# Altium PCB Anchor_G431.PcbDoc
Units mil, origin at the board's own origin, x right, y up, seen from the top; angles counter-clockwise.
Board outline 2086.61 x 1437.01 mil, 2 copper layers (Top Layer, Bottom Layer); 61 components, 45 nets, 232 pads, 79 vias.
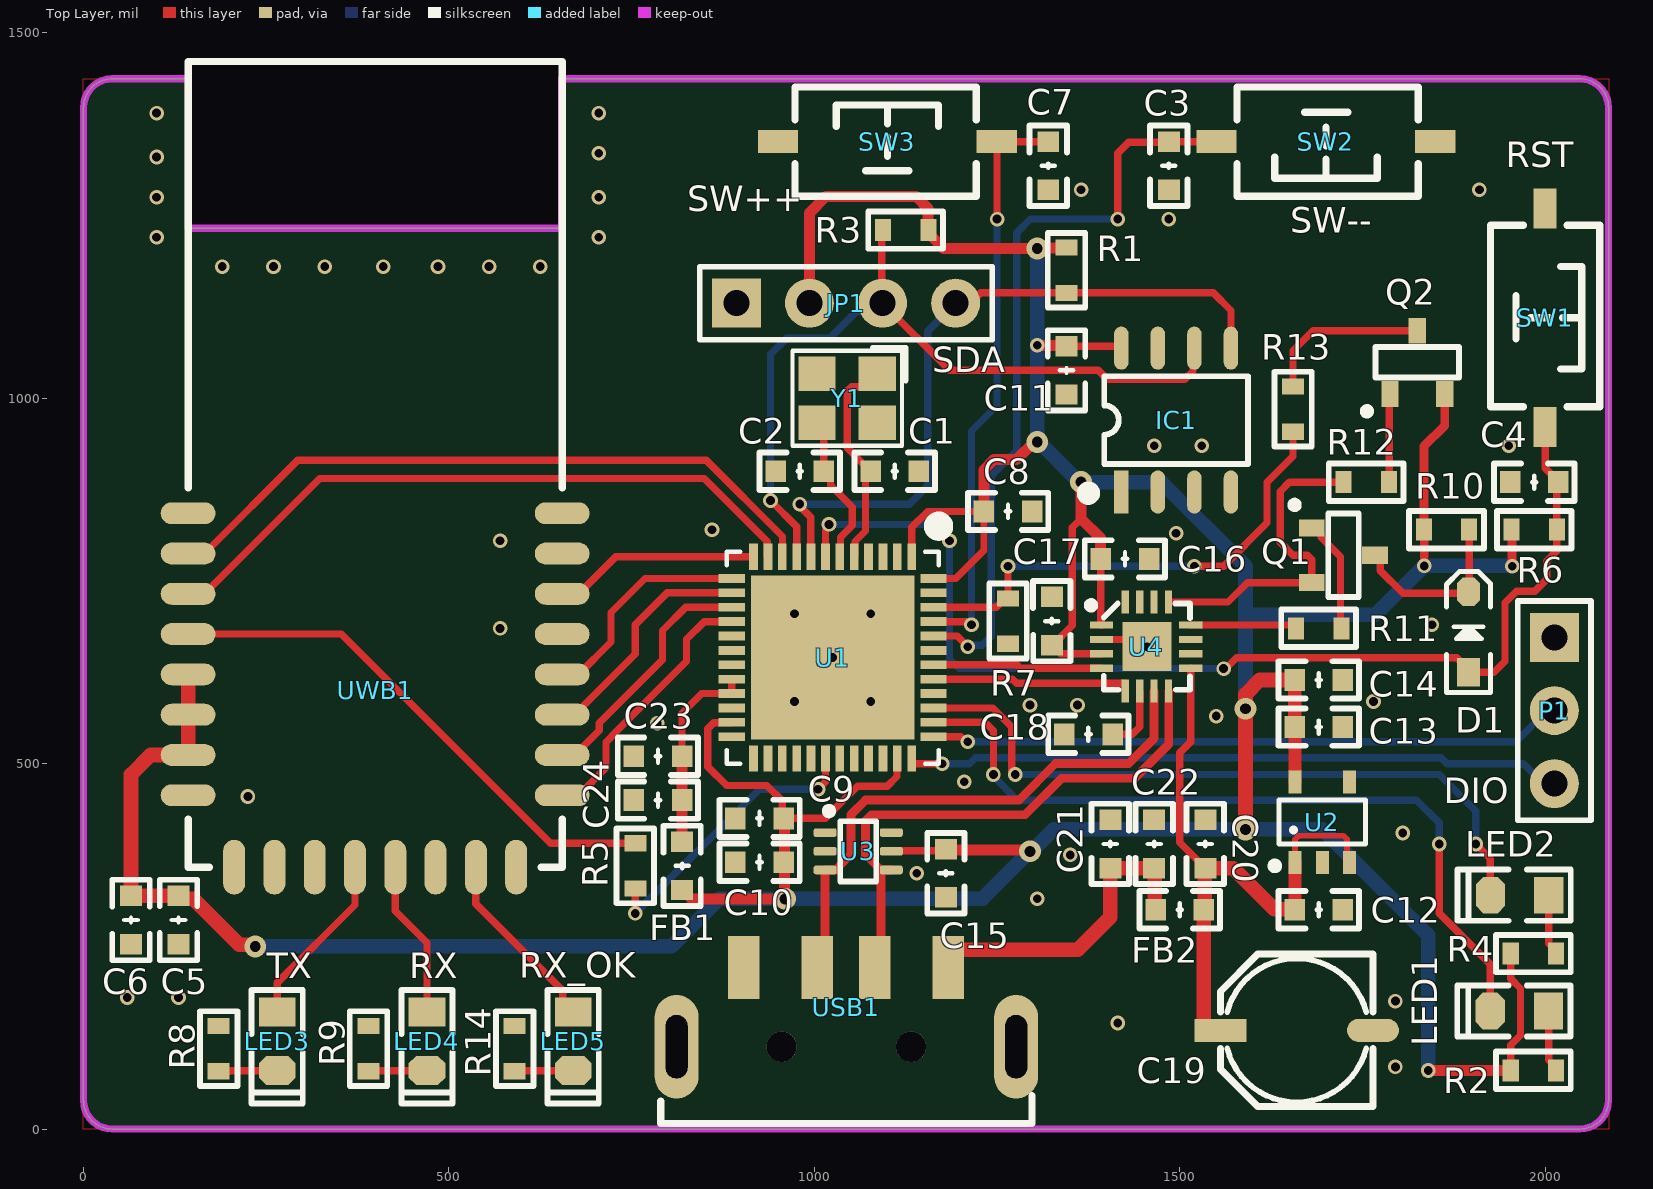
[diagram p0: Top Layer view]
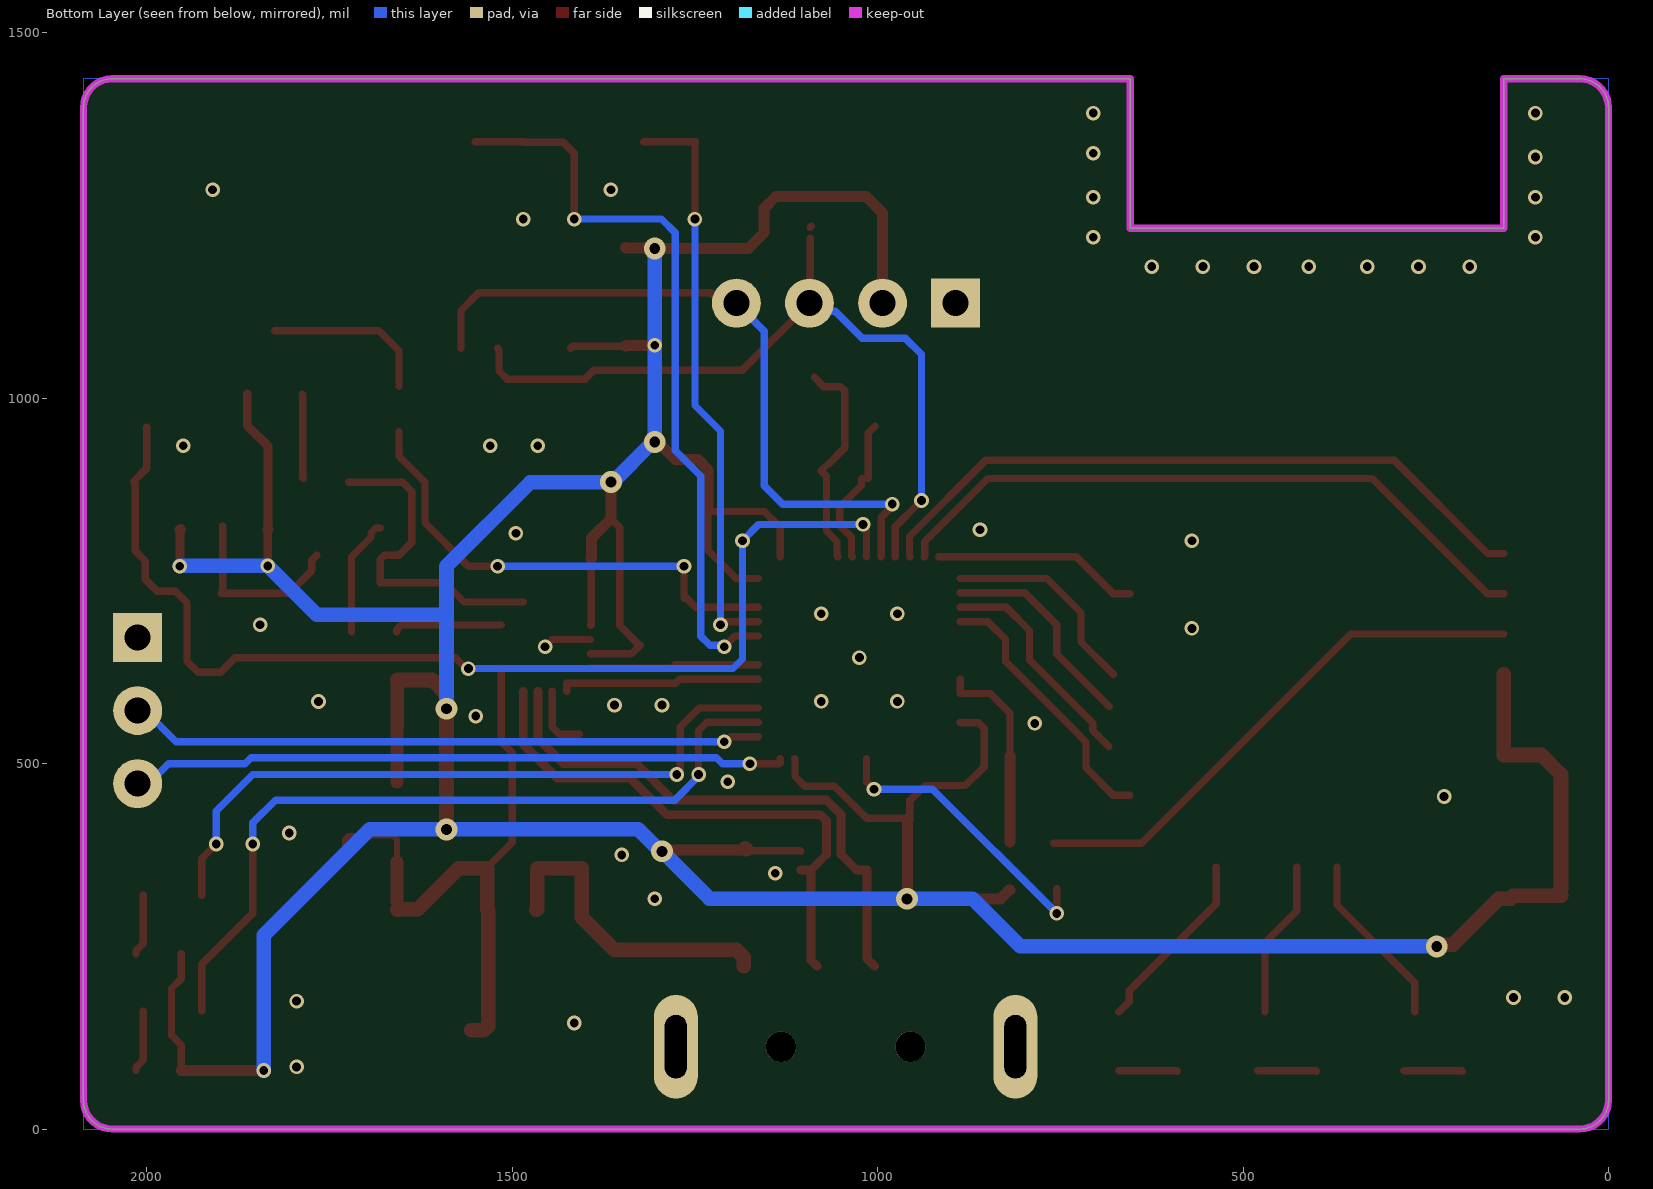
[diagram p1: Bottom Layer view, seen from below]

## Layer stack, top to bottom
Top Solder: solder mask 0.4, Solder Resist, Dk 3.5
Top Layer: signal copper 1.4
Dielectric 1: dielectric 12.6, FR-4, Dk 4.8
Bottom Layer: signal copper 1.4
Bottom Solder: solder mask 0.4, Solder Resist, Dk 3.5

## Board outline
0,39.37 0,1397.64 cw(c39.37,1397.64) 39.37,1437.01 143.49,1437.01 143.49,1232.28 654.29,1232.28 654.29,1437.01 2047.24,1437.01 cw(c2047.24,1397.64) 2086.61,1397.64 2086.61,39.37 cw(c2047.24,39.37) 2047.24,0 39.37,0 cw(c39.37,39.37)

## Design rules (kind name [scope] priority, off if disabled: settings)
AssemblyTestPointUsage [All] p0: scope1count=1 scope1_0_kind=Board scope1_0_value=Board scope2count=1 scope2_0_kind=Board scope2_0_value=Board commentlength=0
AssemblyTestpoint [All] p0: scope1count=1 scope1_0_kind=Board scope1_0_value=Board scope2count=1 scope2_0_kind=Board scope2_0_value=Board commentlength=0
Clearance [All] p0: scope1count=1 scope1_0_kind=Board scope1_0_value=Board scope2count=1 scope2_0_kind=Board scope2_0_value=Board commentlength=0 gap=8
Clearance Frame_Shrink [All] p0 off: scope1count=1 scope1_0_kind=Layer scope1_0_value=TOP scope2count=1 scope2_0_kind=Board scope2_0_value=Board commentlength=48 gap=15 // Protel DXP Scope 2 Expression Was: InPolygon
Clearance Chip_Pin [All] p0: scope1count=1 scope1_0_kind=Component scope1_0_value=BK1','USBC1','U1 scope2count=1 scope2_0_kind=Board scope2_0_value=Board commentlength=0 gap=6
Clearance RF_Pour_Clearance [All] p0 off: scope1count=1 scope1_0_kind=NetClass scope1_0_value=RF scope2count=1 scope2_0_kind=Board scope2_0_value=Board commentlength=48 gap=15 // Protel DXP Scope 2 Expression Was: InPolygon
Clearance RF_Pour_Clearance [InNetClass('RF') vs InPolygon] p1: gap=15 ignorepadtopadclearanceinfootprint=TRUE
Clearance Chip_Pin [InComponent('BK1','USBC1','U1')] p2: gap=6 ignorepadtopadclearanceinfootprint=TRUE
Clearance Frame_Shrink [OnLayer('Keep-Out Layer') vs InPolygon] p3: gap=15 ignorepadtopadclearanceinfootprint=FALSE
Clearance [All] p4: gap=8 ignorepadtopadclearanceinfootprint=TRUE
ComponentClearance [All] p0: scope1count=1 scope1_0_kind=Board scope1_0_value=Board scope2count=1 scope2_0_kind=Board scope2_0_value=Board commentlength=0 gap=10 collisioncheckmode=3
DiffPairsRouting [All] p0: scope1count=1 scope1_0_kind=Board scope1_0_value=Board scope2count=1 scope2_0_kind=Board scope2_0_value=Board commentlength=0
DiffPairsRouting [All] p1: maxlimit=10 minlimit=10 mostfreqgap=10 toplayer_minwidth=8 toplayer_maxwidth=15 toplayer_prefwidth=8 bottomlayer_minwidth=8 bottomlayer_maxwidth=15 bottomlayer_prefwidth=8 maxuncoupledlength=500
FabricationTestPointUsage [All] p0: scope1count=1 scope1_0_kind=Board scope1_0_value=Board scope2count=1 scope2_0_kind=Board scope2_0_value=Board commentlength=0 valid=0 allowmultiple=FALSE
FabricationTestpoint [All] p0: scope1count=1 scope1_0_kind=Board scope1_0_value=Board scope2count=1 scope2_0_kind=Board scope2_0_value=Board commentlength=0 side=3 testpointundercomponent=TRUE minsize=40 maxsize=100 preferedsize=60 minholesize=0 maxholesize=40 preferedholesize=32 testpointgrid=1
FanoutControl Fanout_Default [All] p0: scope1count=1 scope1_0_kind=Board scope1_0_value=Board scope2count=1 scope2_0_kind=Board scope2_0_value=Board commentlength=30 // Fanout_Default (Default Rule)
FanoutControl Fanout_Small [All] p0 off: scope1count=1 scope1_0_kind=Board scope1_0_value=Board scope2count=1 scope2_0_kind=Board scope2_0_value=Board commentlength=84 // Protel DXP Scope 1 Expression Was: (CompPinCount < 5)   Fanout_Small (Default Rule)
FanoutControl Fanout_SOIC [All] p0 off: scope1count=1 scope1_0_kind=Board scope1_0_value=Board scope2count=1 scope2_0_kind=Board scope2_0_value=Board commentlength=71 // Protel DXP Scope 1 Expression Was: IsSOIC   Fanout_SOIC (Default Rule)
FanoutControl Fanout_LCC [All] p0 off: scope1count=1 scope1_0_kind=Board scope1_0_value=Board scope2count=1 scope2_0_kind=Board scope2_0_value=Board commentlength=69 // Protel DXP Scope 1 Expression Was: IsLCC   Fanout_LCC (Default Rule)
FanoutControl Fanout_BGA [All] p0 off: scope1count=1 scope1_0_kind=Board scope1_0_value=Board scope2count=1 scope2_0_kind=Board scope2_0_value=Board commentlength=69 // Protel DXP Scope 1 Expression Was: IsBGA   Fanout_BGA (Default Rule)
Height [All] p0: scope1count=1 scope1_0_kind=Board scope1_0_value=Board scope2count=1 scope2_0_kind=Board scope2_0_value=Board commentlength=0
HoleSize [All] p0: scope1count=1 scope1_0_kind=Board scope1_0_value=Board scope2count=1 scope2_0_kind=Board scope2_0_value=Board commentlength=0 absolutevalues=TRUE maxlimit=100 minlimit=1 maxpercent=80.000 minpercent=20.000
HoleToHoleClearance [All] p0: scope1count=1 scope1_0_kind=Board scope1_0_value=Board scope2count=1 scope2_0_kind=Board scope2_0_value=Board commentlength=0
LayerPairs [All] p0: scope1count=1 scope1_0_kind=Board scope1_0_value=Board scope2count=1 scope2_0_kind=Board scope2_0_value=Board commentlength=0 enforce=TRUE
MatchedLengths DiffPair_MatchedLengths [All] p0 off: scope1count=1 scope1_0_kind=Board scope1_0_value=Board scope2count=1 scope2_0_kind=Board scope2_0_value=Board commentlength=64 tolerance=1000 amplitude=200 gap=20 style=90-Degree // Protel DXP Scope 1 Expression Was: InDifferentialPair ('UD')
MatchedLengths DiffPair_MatchedLengths [InDifferentialPair ('UD')] p1: tolerance=1000 checknetsindiffpair=FALSE checkdiffpairvsdiffpair=TRUE checkxsignals=TRUE checkothers=TRUE
MinimumSolderMaskSliver [All] p0: scope1count=1 scope1_0_kind=Board scope1_0_value=Board scope2count=1 scope2_0_kind=Board scope2_0_value=Board commentlength=0
MinimumSolderMaskSliver [All] p1: minsoldermaskwidth=0
NetAntennae [All] p0: scope1count=1 scope1_0_kind=Board scope1_0_value=Board scope2count=1 scope2_0_kind=Board scope2_0_value=Board commentlength=0
PasteMaskExpansion [All] p0: scope1count=1 scope1_0_kind=Board scope1_0_value=Board scope2count=1 scope2_0_kind=Board scope2_0_value=Board commentlength=0 expansion=0
PlaneClearance [All] p0: scope1count=1 scope1_0_kind=Board scope1_0_value=Board scope2count=1 scope2_0_kind=Board scope2_0_value=Board commentlength=0 clearance=15
PlaneClearance [All] p1: clearance=15
PlaneConnect [All] p0: scope1count=1 scope1_0_kind=Board scope1_0_value=Board scope2count=1 scope2_0_kind=Board scope2_0_value=Board commentlength=0 planeconnectstyle=Direct reliefexpansion=20 reliefentries=4 reliefconductorwidth=15 reliefairgap=10
PlaneConnect [All] p1: planeconnectstyle=Direct reliefexpansion=20 reliefentries=4 reliefconductorwidth=15 reliefairgap=10
PolygonConnect [All] p0: scope1count=1 scope1_0_kind=Board scope1_0_value=Board scope2count=1 scope2_0_kind=Board scope2_0_value=Board commentlength=0 connectstyle=Relief reliefconductorwidth=15 reliefentries=4 polygonreliefangle="90 Angle"
PolygonConnect PolygonConnect_RF [All] p0: scope1count=1 scope1_0_kind=ComponentClass scope1_0_value=RF_Comp scope2count=1 scope2_0_kind=Board scope2_0_value=Board commentlength=0 connectstyle=Direct reliefconductorwidth=10 reliefentries=4 polygonreliefangle="90 Angle"
PolygonConnect PolygonConnect_RF [InComponentClass('RF_Comp')] p1: connectstyle=Direct reliefconductorwidth=10 reliefentries=4 polygonreliefangle="90 Angle" airgapwidth=10
PolygonConnect [All] p2: thpad.connectstyle=Relief thpad.reliefconductorwidth=15 thpad.reliefentries=4 thpad.polygonreliefangle="90 Angle" thpad.airgapwidth=10 smdpad.connectstyle=Relief smdpad.reliefconductorwidth=10 smdpad.reliefentries=4 smdpad.polygonreliefangle="90 Angle" smdpad.airgapwidth=10 via.connectstyle=Direct via.reliefconductorwidth=10 via.reliefentries=4 via.polygonreliefangle="90 Angle" via.airgapwidth=10
RoutingCorners [All] p0: scope1count=1 scope1_0_kind=Board scope1_0_value=Board scope2count=1 scope2_0_kind=Board scope2_0_value=Board commentlength=0 cornerstyle=45-Degree minsetback=100 maxsetback=100
RoutingLayers [All] p0: scope1count=1 scope1_0_kind=Board scope1_0_value=Board scope2count=1 scope2_0_kind=Board scope2_0_value=Board commentlength=0 top layer=Automatic bottom layer=Automatic
RoutingPriority [All] p0: scope1count=1 scope1_0_kind=Board scope1_0_value=Board scope2count=1 scope2_0_kind=Board scope2_0_value=Board commentlength=0
RoutingTopology [All] p0: scope1count=1 scope1_0_kind=Board scope1_0_value=Board scope2count=1 scope2_0_kind=Board scope2_0_value=Board commentlength=0 topology=Shortest
RoutingVias [All] p0: scope1count=1 scope1_0_kind=Board scope1_0_value=Board scope2count=1 scope2_0_kind=Board scope2_0_value=Board commentlength=0 holewidth=12 width=20 viastyle="Through Hole" minholewidth=12 minwidth=18 maxholewidth=25 maxwidth=50
RoutingVias [All] p1: holewidth=12 width=20 viastyle="Through Hole" minholewidth=12 minwidth=18 maxholewidth=25 maxwidth=50
ShortCircuit [All] p0: scope1count=1 scope1_0_kind=Board scope1_0_value=Board scope2count=1 scope2_0_kind=Board scope2_0_value=Board commentlength=0 allowed=FALSE
SilkToBoardRegionClearance [All] p0: scope1count=1 scope1_0_kind=Board scope1_0_value=Board scope2count=1 scope2_0_kind=Board scope2_0_value=Board commentlength=0
SilkToSilkClearance [All] p0: scope1count=1 scope1_0_kind=Board scope1_0_value=Board scope2count=1 scope2_0_kind=Board scope2_0_value=Board commentlength=0
SilkToSilkClearance [All] p1: silktosilkclearance=0
SilkToSolderMaskClearance [All] p0 off: scope1count=1 scope1_0_kind=Board scope1_0_value=Board scope2count=1 scope2_0_kind=Board scope2_0_value=Board commentlength=44 // Protel DXP Scope 1 Expression Was: IsPad
SilkToSolderMaskClearance [IsPad] p1: minsilkscreentomaskgap=0 clearancetoexposedcopper=TRUE
SolderMaskExpansion [All] p0: scope1count=1 scope1_0_kind=Board scope1_0_value=Board scope2count=1 scope2_0_kind=Board scope2_0_value=Board commentlength=0 expansion=4
SolderMaskExpansion [All] p1: expansion=4 istentingtop=FALSE
UnRoutedNet [All] p0: scope1count=1 scope1_0_kind=Board scope1_0_value=Board scope2count=1 scope2_0_kind=Board scope2_0_value=Board commentlength=0
UnpouredPolygon [All] p0: scope1count=1 scope1_0_kind=Board scope1_0_value=Board scope2count=1 scope2_0_kind=Board scope2_0_value=Board commentlength=0
Width [All] p0: scope1count=1 scope1_0_kind=Board scope1_0_value=Board scope2count=1 scope2_0_kind=Board scope2_0_value=Board commentlength=0 maxlimit=30 minlimit=8 preferedwidth=10
Width PWR [All] p0: scope1count=1 scope1_0_kind=NetClass scope1_0_value=PWR scope2count=1 scope2_0_kind=Board scope2_0_value=Board commentlength=0 maxlimit=50 minlimit=8 preferedwidth=15
Width PWR [InNetClass('PWR')] p1: maxlimit=50 minlimit=8 preferedwidth=15
Width [All] p2: maxlimit=30 minlimit=8 preferedwidth=10
24 further rules are at their usual default settings.

## Classes and differential pairs
net class PWR: 3V3 GND USB_5V VBUS

## Components (designator, comment, footprint, x,y, rotation, side; value= is the part's Value field where it differs from the comment)
C1 "Cap" "C 0603_L" 1110,900 r180 top
C2 "Cap" "C 0603_L" 980,900 r0 top
C3 "Cap" "C 0603_L" 1485,1318 r270 top
C4 "Cap" "C 0603_L" 1985,885 r0 top
C5 "Cap" "C 0603_L" 130,286 r90 top
C6 "Cap" "C 0603_L" 65,286 r270 top
C7 "Cap" "C 0603_L" 1320,1318 r270 top
C8 "Cap" "C 0603_L" 1265,845 r0 top
C9 "Cap" "C 0603_L" 925,425 r0 top
C10 "Cap" "C 0603_L" 925,365 r0 top
C11 "Cap" "C 0603_L" 1345,1038 r90 top
C12 "Cap" "C 0603_L" 1690,300 r0 top
C13 "Cap" "C 0603_L" 1690,550 r0 top
C14 "Cap" "C 0603_L" 1690,614.41 r0 top
C15 "Cap" "C 0603_L" 1180,350 r90 top
C16 "Cap" "C 0603_L" 1425,780 r0 top
C17 "Cap" "C 0603_L" 1325,695 r270 top
C18 "Cap" "C 0603_L" 1375,540 r0 top
C19 "Cap Pol1" "CM C(5*5.4)" 1660,135 r180 top
C20 "Cap" "C 0603_L" 1535,390 r270 top
C21 "Cap" "C 0603_L" 1405,390 r270 top
C22 "Cap" "C 0603_L" 1465,390 r270 top
C23 "Cap" "C 0603_L" 786,510 r180 top
C24 "Cap" "C 0603_L" 786,450 r180 top
D1 "1N4148" SOD-323 1895,680 r90 top
FB1 "Ferrite bead" "C 0603_L" 819,360 r270 top
FB2 "Ferrite bead" "C 0603_L" 1500,300 r180 top
IC1 "24Cxx" SOP8_L 1495,970 r90 top
JP1 "HDR-1X4" HDR2.54-LI-4P 1043.31,1129.92 r0 top
LED1 "黄色" "LED 0805G" 1964.69,161.49 r180 top
LED2 "红色" "LED 0805R" 1965,320 r180 top
LED3 "橙色" "LED 0805G" 265,120 r270 top
LED4 "绿色" "LED 0805G" 470,120 r270 top
LED5 "蓝色" "LED 0805G" 670,120 r270 top
P1 "Header 3" HDR2.54-LI-3P 2012.52,572.52 r270 top
Q1 "SS8050" SOT-23-3L 1720,785 r0 top
Q2 "SS8550" SOT-23-3L 1825,1045 r90 top
R1 "Resistor" "R 0603_L" 1345,1175 r270 top
R2 "Resistor" "R 0603_L" 1983.82,80.32 r180 top
R3 "Resistor" "R 0603_L" 1125,1230 r180 top
R4 "Resistor" "R 0603_L" 1983.82,240 r180 top
R5 "Resistor" "R 0603_L" 755,360 r90 top
R6 "Resistor" "R 0603_L" 1985,820 r180 top
R7 "Resistor" "R 0603_L" 1265,695 r90 top
R8 "Resistor" "R 0603_L" 185,110 r90 top
R9 "Resistor" "R 0603_L" 390,110 r90 top
R10 "Resistor" "R 0603_L" 1865,820 r0 top
R11 "Resistor" "R 0603_L" 1690,685 r0 top
R12 "Resistor" "R 0603_L" 1755,885 r0 top
R13 "Resistor" "R 0603_L" 1655,985 r270 top
R14 "Resistor" "R 0603_L" 590,110 r90 top
SW1 "3x6x5" "TSW SMD-3*6*2.5" 2000,1110 r270 top
SW2 "3x6x5" "TSW SMD-3*6*2.5" 1700,1351 r180 top
SW3 "3x6x5" "TSW SMD-3*6*2.5" 1100,1351 r0 top
U1 "STM32G431CBU6" UFQFPN-48_7X7X0P55MM 1025,645 r270 top
U2 "RT9013" SOT23-5L 1695,420 r0 top
U3 "CH412K" SOT-363 1060,380 r270 top
U4 "CH343P" QFN16 1455,660 r0 top
USB1 "USB" USB_A/P_B 1043.31,112.6 r0 top
UWB1 "UWB-X3" UWB-X3-MAX-IPEX 143.19,358.27 r270 top
Y1 "8MHz ±20ppm 20pF" "OSC 3225-4P" 1045,1000 r180 top

## Footprints (in the part's own frame and the unit in brackets; to place one, negate y for a bottom-side part, rotate by r counter-clockwise, add the part's x,y. Pads: shape width x height; smd on the part's side, far side on the other; paste and mask are expansions set on the pad)
"C 0603_L" [mil] "无极性贴片电容                                       淘宝ID:黄晶宝石"
  rect 28x30 smd: 1(-33,0) 2(33,0)
  silkscreen extent -55,-26 55,26
"CM C(5*5.4)" [mm] "贴片电解电容，直径5mm，高5.4mm            淘宝ID:黄晶宝石"
  rect 1.8x0.8 smd: 1(2.65,0)
  oval 1.8x0.8 smd: 2(-2.65,0)
  silkscreen extent -2.65,-2.65 2.65,2.65
HDR2.54-LI-3P [mm] "排针，3脚"
  rect 1.7x1.7 hole 0.9: 1(-2.54,0)
  round 1.7 hole 0.9: 2(0,0) 3(2.54,0)
  silkscreen extent -3.81,-1.27 3.81,1.27
HDR2.54-LI-4P [mm] "排针，4脚"
  rect 1.7x1.7 hole 0.9: 1(-3.81,0)
  round 1.7 hole 0.9: 2(-1.27,0) 3(1.27,0) 4(3.81,0)
  silkscreen extent -5.08,-1.27 5.08,1.27
"LED 0805G" [mil] "绿色0805LED                              淘宝ID:黄晶宝石"
  rect 40x50 smd: 1(-40,0)
  oct 40x50 smd: 2(40,0)
  silkscreen extent -70,-35 85,35
"LED 0805R" [mil] "红色0805LED                                       淘宝ID:黄晶宝石"
  rect 40x50 smd: 1(-40,0)
  oct 40x50 smd: 2(40,0)
  silkscreen extent -70,-35 85,35
"OSC 3225-4P" [mm] "3.2*2.5*0.7mm(长宽高)                         淘宝ID:黄晶宝石"
  rect 1.3x1.2 smd: 1(-1.05,-0.85) 2(1.05,-0.85) 3(1.05,0.85) 4(-1.05,0.85)
  silkscreen extent -2.03,-1.75 1.91,1.65
QFN16 [mm] "3mm*3mm 封装库来自淘宝卖家 ID：黄晶宝石"
  rect 1.7x1.7 smd: 0(0,0)
  rect 0.8x0.25 smd: 1(-1.575,0.75) 2(-1.575,0.25) 3(-1.575,-0.25) 4(-1.575,-0.75) 9(1.524,-0.75) 10(1.524,-0.25) 11(1.524,0.25) 12(1.524,0.75)
  rect 0.25x0.8 smd: 5(-0.75,-1.55) 6(-0.25,-1.55) 7(0.25,-1.55) 8(0.75,-1.55) 13(0.75,1.55) 14(0.25,1.55) 15(-0.25,1.55) 16(-0.75,1.55)
  silkscreen extent -2.07,-1.5 1.5,1.56
"R 0603_L" [mil] "1/10W贴片电阻                 淘宝ID:黄晶宝石"
  rect 22x30 smd: 1(-31,0) 2(31,0)
  silkscreen extent -51,-26 51,26
SOD-323 [mm] "1.8x1.3X0.9mm（长宽高，不包括引脚）"
  rect 1x0.8 smd: 1(-1.4,0)
  oct 1x0.8 smd: 2(1.4,0)
  silkscreen extent -2.11,-0.76 2.11,0.76
SOP8_L [mm] "5*6*1.8mm（长宽高）封装库来自淘宝卖家 ID：黄晶宝石"
  rect 1.5x0.5 smd: 1(-2.5,1.905)
  oval 1.5x0.5 smd: 2(-2.5,0.635) 3(-2.5,-0.635) 4(-2.5,-1.905) 5(2.5,-1.905) 6(2.5,-0.635) 7(2.5,0.635) 8(2.5,1.905)
  silkscreen extent -2.69,-2.5 1.52,3.2
SOT23-5L [mm] "3x1.6x1.1mm(长宽高) 封装库来自淘宝卖家 ID：黄晶宝石"
  rect 0.45x0.8 smd: 1(-0.95,-1.4) 2(0,-1.4) 3(0.95,-1.4) 4(0.95,1.4) 5(-0.95,1.4)
  silkscreen extent -1.78,-1.65 1.5,0.76
SOT-23-3L [mm]
  rect 0.9x0.6 smd: 1(-1,0.95) 2(-1,-0.95) 3(1.2,0)
  silkscreen extent -1.72,-1.45 0.64,1.87
SOT-363 [mm]
  rrect50% 0.3x0.8 smd: 1(-0.65,-1.15) 2(0,-1.15) 3(0.65,-1.15) 4(0.65,1.15) 5(0,1.15) 6(-0.65,1.15)
  silkscreen extent -1.52,-1.14 1.05,0.63
"TSW SMD-3*6*2.5" [mm] "3*6*2.5mm"
  rect 1.4x0.8 smd: 1(-3.8,0) 2(3.8,0)
  silkscreen extent -3.21,-1.9 3.09,1.9
UFQFPN-48_7X7X0P55MM [mil]
  rect 36x12 smd paste+0 mask+0: 1(-138,108.27) 2(-138,88.58) 3(-138,68.9) 4(-138,49.21) 5(-138,29.53) 6(-138,9.84) 7(-138,-9.84) 8(-138,-29.53) 9(-138,-49.21) 10(-138,-68.9) 11(-138,-88.58) 12(-138,-108.27) 25(138,-108.27) 26(138,-88.58) 27(138,-68.9) 28(138,-49.21) 29(138,-29.53) 30(138,-9.84) 31(138,9.84) 32(138,29.53) 33(138,49.21) 34(138,68.9) 35(138,88.58) 36(138,108.27)
  rect 12x36 smd paste+0 mask+0: 13(-108.27,-138) 14(-88.58,-138) 15(-68.9,-138) 16(-49.21,-138) 17(-29.53,-138) 18(-9.84,-138) 19(9.84,-138) 20(29.53,-138) 21(49.21,-138) 22(68.9,-138) 23(88.58,-138) 24(108.27,-138) 37(108.27,138) 38(88.58,138) 39(68.9,138) 40(49.21,138) 41(29.53,138) 42(9.84,138) 43(-9.84,138) 44(-29.53,138) 45(-49.21,138) 46(-68.9,138) 47(-88.58,138) 48(-108.27,138)
  rect 224x224 smd paste-111.5 mask+0: 49(0,0)
  silkscreen extent -190,-145 145,155
USB_A/P_B [mm] "A型USB 插头，20*13*4.5mm"
  round 1.05 hole 1.05: 0(-2.237,0) 0(2.263,0)
  rect 1.1x2.2 smd: 1(3.556,2.75) 2(1,2.75) 3(-1,2.75) 4(-3.556,2.75)
  oval 1.524x3.6 hole 0.762 slot 2.2 at 90 deg: 4(-5.887,0) 4(5.913,0)
  silkscreen extent -6.44,-2.67 6.46,-1.7
UWB-X3-MAX-IPEX [mil]
  oval 30x75 smd: 1(-484.25,0) 2(-429.13,0) 3(-374.02,0) 4(-318.9,0) 5(-263.78,0) 6(-208.66,0) 7(-153.54,0) 8(-98.43,0) 17(-98.43,511.81) 18(-153.54,511.81) 19(-208.66,511.81) 20(-263.78,511.81) 21(-318.9,511.81) 22(-374.02,511.81) 23(-429.13,511.81) 24(-484.25,511.81)
  oval 75x30 smd: 9(0,62.99) 10(0,118.11) 11(0,173.23) 12(0,228.35) 13(0,283.46) 14(0,338.58) 15(0,393.7) 16(0,448.82)
  silkscreen extent -1102,0 0,512

## Part data
C1 C2 C3 C4 C5 C6 C7 C8 C9 C10 C11 C12 C13 C14 C15 C16 C17 C18 C20 C21 C22 C23 C24: "Capacitor"
C19: "Polarized Capacitor (Radial)"
D1: "开关二极管"
FB1 FB2: "铁氧体磁珠"
IC1: "外置EEPROM"
JP1: library part "Header 4", "4P接插件"
LED1 LED2 LED3 LED4 LED5: library part LED-SMD, "贴片LED"
P1: "Header, 3-Pin"
Q1: library part 8050-SMD, "高频放大-NPN型"
Q2: library part 8550-SMD, "高频放大-PNP型"
SW1 SW2 SW3: library part "TSW 3x6", "3x6轻触开关"
U1: "No Description Available"
U2: "LDO"
U3: "四路ESD保护"
U4: library part CH343, "USB转串口"
USB1: library part USB-A/P, "USB-A型公接口"
UWB1: library part UWB-X3(DWM3000)
Y1: library part "SMD-5032_2P 8MHz 20ppm 20pF", "贴片晶振"

## Via types
v1: diameter 20, hole 12, Top Layer to Bottom Layer, tented both sides, 71 vias
v2: diameter 30, hole 15, Top Layer to Bottom Layer, tented both sides, 8 vias

## Nets (pads, with @x,y where several pads share a name; then routed paths per layer and width w, separated by ;. In a path a pad name is that pad's centre, name@x,y a point inside that pad or via, vN(x,y) a via of type N, cw(c..) or ccw(c..) an arc to the next point about the centre after c; other vN are vias at no path point)
3V3: C5.2 C6.1 C8.1 C9.2 C10.2 C11.2 C13.1 C14.1 C15.2 C16.1 C17.2 FB1.2 IC1.8 JP1.2 Q2.2 R1.1 R2.2 R3.1 R4.2 R6.2 R10.1 U1.1 U1.23 U1.35 U1.48 U2.5 U3.5 U4.1 U4.3 UWB1.5 UWB1.6 UWB1.7 | length 7096.8
  Top Layer w10: U1.23 886.39,555.81 862.39,555.81 854.14,547.56 854.14,495.86 880,470 935.04,470 955.9,449.14 955.9,427.1 C9.2 1015,425 1059,469 1099.58,469 1112.98,482.39 1112.98,506.39 U1.35 ; U3.5 1106.18,380.91 C15.2@1181,380.91 ; U1.1 1133.27,823.27 1155,845 C8.1 1232,792 1193.27,753.27 U1.48 ; C11.2 1417.43,1071 IC1.8 ; 1365,835 1353,823 1353,689 1326,662 C17.2 1336.76,650.24 1382.24,650.24 1382.32,650.16 U4.3 ; C16.1 1392,689.61 1392.08,689.53 U4.1 U4.1@1392.91,689.45 ; R2.2 1952.82,114.91 1966.07,128.17 1966.07,192.23 1952.82,205.48 R4.2
  Top Layer w12: R10.1@1834,825 1834,934 1862.4,962.4 Q2.2 ; v1(1834.5,770.5) R10.1@1834.5,819.5 ; R6.2@1954.5,819.5 1954.5,770.5 v1(1955,770)
  Top Layer w15: FB1.2 820,327 832,315 v2(960,315) 959,316 959,365 959,424 C9.2 ; JP1.2 993.31,1253.31 1016.2,1276.2 1138.8,1276.2 1155.63,1259.37 1155.63,1226.37 1177,1205 v2(1305,1205) 1305.5,1205.5 1344.5,1205.5 R1.1 ; C15.2@1181,384 1183.5,381.5 1293.5,381.5 v2(1295,380) ; C8.1 1232,902 1245.92,915.92 1276.86,915.92 1300.94,940 v2(1305,940) ; v1(1305,1072.5) 1305.75,1071.75 1344.25,1071.75 C11.2 ; v2(1365,885) 1365,835 1391.29,808.71 1391.29,780.71 C16.1 ; R10.1 R10.1@1834.5,819.5 ; v1(1840,80) 1840.16,80.16 1952.66,80.16 R2.2 ; R6.2 R6.2@1954.5,819.5
  Top Layer w18: C13.1@1657.3,550 C14.1@1657.3,614.11 ; U2.5 C13.1@1657.6,549.4
  Top Layer w20: C6.1 C5.2@131,319 ; C6.1@65,328 65,485 91.81,511.81 UWB1.7 UWB1.6 UWB1.5 ; C5.2 134,315 150,315 213.09,251.91 233.09,251.91 v2(235,250) ; C15.2 C15.2@1181,384 ; v2(1590,410) v2(1590,575) 1590,595 1609.41,614.41 C14.1 C14.1@1657.3,614.11
  Bottom Layer w20: v2(235,250) 805,250 870,315 v2(960,315) 1230,315 v2(1295,380) 1297.71,380 1327.71,410 v2(1590,410) 1695,410 1840,265 v1(1840,80) ; v2(1305,1205) v1(1305,1072.5) v2(1305,940) 1307.5,940 1362.5,885 v2(1365,885) 1475,885 1590,770 1590,703.52 ; v2(1590,575) 1590,703.52 ; v1(1955,770) 1954.5,770.5 v1(1834.5,770.5) 1767.52,703.52 1590,703.52
BOOT0: R7.2 R13.2 U1.46 | length 669.4
  Top Layer w10: U1.46 1248.9,713.9 1261,726 R7.2 v1(1265,770) ; v1(1520,770) 1560,770 1619.32,829.32 1619.32,884.78 1655,920.46 R13.2
  Bottom Layer w10: v1(1265,770) v1(1520,770)
D_DATA_N: U3.4 U4.8 USB1.2 | length 758.1
  Top Layer w12: USB1.2@1082.68,222.6 1091.14,231.06 1091.14,349.93 U3.4@1095.62,354.41 ; U3.4 U3.4@1095.62,354.41 ; U4.8@1484.84,598.99 1484.84,526.56 1438.28,480 1338.28,480 1288.28,430 1078.28,430 1070,421.72 1070,375.55 1091.14,354.41 U3.4@1095.62,354.41
D_DATA_P: U3.3 U4.7 USB1.3 | length 757.2
  Top Layer w12: USB1.3@1003.94,222.6 1014.72,233.39 U3.3 1022.97,354.41 1028.86,354.41 1050,375.55 1050,430 1070,450 1280,450 1330,500 1430,500 1464.84,534.84 U4.7
DTR: R11.1 U4.12 | length 149
  Top Layer w10: U4.12 1652,689.53 1658,683.53 R11.1@1658,680
DW_IRQn: U1.12 UWB1.22 | length 282.7
  Top Layer w10: UWB1.22 677.5,732.28 728.22,783 U1.12
DW_MISO: U1.14 UWB1.19 | length 291.8
  Top Layer w10: UWB1.19@683.06,578.06 755,650 755,690 798.58,733.58 U1.14
DW_MOSI: U1.15 UWB1.18 | length 311.8
  Top Layer w10: UWB1.18@683.6,523.32 705.5,545.22 705.5,555.5 792.12,642.12 792.12,682.12 823.9,713.9 U1.15
DW_NSS: U1.16 UWB1.17 | length 368.9
  Top Layer w10: UWB1.17 677.5,456.69 715,494.19 715,529.27 723.5,537.77 723.5,538.5 825,640 825,670 849.21,694.21 U1.16
DW_RESET: U1.11 UWB1.3 | length 914.5
  Top Layer w10: UWB1.3 165.69,732.28 323.4,890 849.29,890 935.42,803.87 935.42,784 U1.11
DW_SCK: U1.13 UWB1.20 | length 287.5
  Top Layer w10: UWB1.20@677.5,622.05 721.68,666.23 721.68,706.68 768.27,753.27 U1.13
DW_WUP: U1.10 UWB1.2 | length 937.1
  Top Layer w10: UWB1.2 165.69,787.4 293.29,915 852.02,915 956.44,810.57 956.44,783.34 U1.10
GND: C1.1 C2.1 C3.2 C4.1 C5.1 C6.2 C7.2 C8.2 C9.1 C10.1 C11.1 C12.2 C13.2 C14.2 C15.1 C16.2 C17.1 C18.1 C19.2 C20.1 C21.1 C22.1 C23.2 C24.2 IC1.1 IC1.2 IC1.3 IC1.4 JP1.1 P1.1 R7.1 R8.2 R9.2 R14.2 SW1.1 SW2.1 SW3.1 U1.49 U2.2 U3.2 U4.0 U4.2 USB1.4 UWB1.8 UWB1.16 UWB1.21 UWB1.23 UWB1.24 | length 66.1
  Top Layer w10: U4.2 1445.16,669.84 v1(1455,660)
  other v1: 1795,85 1415,145 1795,175 60,180 130,180 1305,315 1140,350 1350,375 1805,405 225,455 1205,475 785,555 1550,565 1295,580 1360,580 972.94,585.06 1077.06,585.06 1765,585 1025,645 570,685 1845,690 972.94,704.94 1077.06,704.94 570,805 1495,815 860,820 1465,935 1530,935 1950,935 190,1180 260,1180 330,1180 410,1180 485,1180 555,1180 625,1180 100,1220 705,1220 1485,1245 100,1275 705,1275 1365,1285 1910,1285 100,1330 705,1335 100,1390 705,1390
LED1: LED1.2 U1.38 | length 1071.8
  Top Layer w10: U1.38 1233.58,556.42 1245,545 v1(1245,485) ; v1(1855,390) 1855,295 1924.69,225.32 LED1.2
  Bottom Layer w10: v1(1245,485) 1245,482.47 1277.47,450 1823.83,450 1855,418.83 v1(1855,390)
LED2: LED2.2 U1.39 | length 958.9
  Top Layer w10: U1.39 1243.9,576.1 1270,550 1270,490 v1(1275,485) ; v1(1905,390) 1925,370 LED2.2
  Bottom Layer w10: v1(1275,485) 1855,485 1905,435 v1(1905,390)
MCU_RX: U1.42 U4.4 | length 231.9
  Top Layer w10: U1.42 1276.82,635.16 1281.5,630.47 U4.4
MCU_TX: U1.41 U4.5 | length 275.5
  Top Layer w10: U1.41 1271.05,615.47 1276.78,609.74 1425.39,609.74 1425.47,609.66 U4.5
NetC1_2: C1.2 U1.5 Y1.1 | length 299.1
  Top Layer w10: U1.5 1055.53,784 1055.53,803.87 1070,818.34 1070,893 C1.2 1077,901 1068,910 1067,910 1045,932 1045,1009.91 1050.86,1015.77 1073.65,1015.77 Y1.1@1086.34,1028.46
NetC2_2: C2.2 U1.6 Y1.3 | length 209.9
  Top Layer w10: Y1.3@1003.66,961.54 1013,952.2 C2.2@1013,891 ; C2.2@1013,890 1022,890 1022,881 1052,851 1052,825.8 1035.84,809.64 1035.84,784 U1.6
NetC3_1: C3.1 SW2.2 U1.44 | length 1035
  Top Layer w10: U1.44 1195.47,674.53 v1(1210,660) ; v1(1415,1245) 1415,1335 1430,1350 1484,1350 C3.1 SW2.2
  Bottom Layer w10: v1(1210,660) 1211.91,661.91 1229.5,661.91 1242,674.41 1242,893.4 1277,928.4 1277,1226.14 1295.86,1245 v1(1415,1245)
NetC7_1: C7.1 SW3.2 U1.45 | length 799.8
  Top Layer w10: U1.45 1210.79,694.21 v1(1215,690) ; v1(1250,1245) 1250,1350.61 SW3.2 C7.1
  Bottom Layer w10: v1(1215,690) 1215,955 1250,990 v1(1250,1245)
NetC18_2: C18.2 U4.6 | length 90.2
  Top Layer w10: C18.2 1435,540 1445.08,550.08 1445.08,598.91 U4.6
NetC23_1: C23.1 C24.1 FB1.1 U1.20 U1.21 | length 274.8
  Top Layer w10: C23.1 819,569 845.79,595.79 U1.21 U1.20
  Top Layer w15: FB1.1 C24.1 C23.1
NetD1_2: D1.2 Q1.3 R10.2 | length 250.8
  Top Layer w10: Q1.3 1767.66,785 1774.47,778.19 1774.47,764.05 1805.37,733.15 D1.2@1898.03,733.15 ; D1.2 1896,736.12 R10.2@1896,825
NetLED1_1: LED1.1 R2.1 | length 85.4
  Top Layer w10: LED1.1 2004.69,94.45 2014.82,84.32 R2.1
NetLED2_1: LED2.1 R4.1 | length 84.1
  Top Layer w10: LED2.1 2005,253.82 2014.82,244 R4.1
NetLED3_1: LED3.1 UWB1.12 | length 242.4
  Top Layer w10: LED3.1 265,200 371.54,306.54 UWB1.12
NetLED3_2: LED3.2 R8.1 | length 80.4
  Top Layer w10: 200,79 200.5,79.5 279.5,79.5 LED3.2@280,80
NetLED4_1: LED4.1 UWB1.13 | length 216.2
  Top Layer w10: UWB1.13 426.65,298.35 470,255 LED4.1
NetLED4_2: LED4.2 R9.1 | length 80.4
  Top Layer w10: R9.1@400,79 400.5,79.5 479.5,79.5 LED4.2@480,80
NetLED5_1: LED5.1 UWB1.15 | length 253.4
  Top Layer w10: UWB1.15 536.89,308.11 655.86,189.14 655.86,174.14 LED5.1
NetLED5_2: LED5.2 R14.1 | length 80.4
  Top Layer w10: R14.1 590.5,79.5 669.5,79.5 LED5.2
NetQ1_1: Q1.1 R11.2 | length 162.2
  Top Layer w10: Q1.1 1686.54,822.4 1693.35,815.59 1693.35,809.69 1720,783.03 R11.2@1720,680
NetQ2_1: Q2.1 R12.2 | length 116.3
  Top Layer w10: R12.2@1786,890 1786.8,890.8 1786.8,1004.83 Q2.1
NetQ2_3: Q2.3 R13.1 | length 230.3
  Top Layer w10: R13.1 1655,1065 1682.24,1092.24 Q2.3
NetR5_2: R5.2 UWB1.4 | length 734.8
  Top Layer w10: UWB1.4 352.83,677.17 639,391 R5.2@759.47,391
PA13: P1.3 U1.36 | length 904
  Top Layer w10: U1.36 1133.27,500.8 1134.27,499.8 v1(1174.74,499.8)
  Bottom Layer w10: v1(1174.74,499.8) 1212.33,499.8 1220.53,508 1857.46,508 1865.65,499.8 1970.34,499.8 1997.62,472.52 P1.3
PA14: P1.2 U1.37 | length 869.9
  Top Layer w10: U1.37 1200.56,536.73 1207.29,530 v1(1210,530)
  Bottom Layer w10: v1(1210,530) 1960,530 2002.52,572.52 P1.2
RESET: C4.2 D1.1 R6.1 SW1.2 U1.7 | length 1541.4
  Top Layer w10: U1.7 1015.16,819.62 1020.07,824.54 v1(1020.07,827.25) ; v1(1560,630) 1562.71,630 1577.71,645 1878.82,645 1898.94,624.88 1929.88,624.88 1945,640 1945,720 1960.64,735.64 1985.64,735.64 2002.08,752.08 2002.08,777.08 2016,791 2016,883 C4.2 2018,886 2000,904 SW1.2
  Bottom Layer w10: v1(1020.07,827.25) 1162.75,827.25 v1(1185,805) 1185,642.98 1197.98,630 v1(1560,630)
RTS: Q1.2 R12.1 U4.13 | length 453.3
  Top Layer w10: U4.13 1566.01,721.01 1592.6,747.6 Q1.2 1680.63,779.14 1674.77,785 1655,785 1637.32,802.68 1637.32,872.32 1650,885 R12.1
SCK: IC1.6 JP1.3 R3.2 U1.9 | length 1069.8
  Top Layer w10: v1(940,860) 975.79,824.21 U1.9 ; R3.2@1091,1235 R3.2@1092.15,1233.85 ; R3.2@1092.15,1218.85 1092.15,1131.07 JP1.3 1185.23,1038 1388.57,1038 1400.68,1025.9 1507,1025.9 1518.15,1037.04 1518.15,1066.57 IC1.6
  Bottom Layer w10: v1(940,860) 940,1060 962.09,1082.09 1020.89,1082.09 1057.83,1119.03 1082.41,1119.03 JP1.3
SDA: IC1.5 JP1.4 R1.2 U1.8 | length 973.6
  Top Layer w10: v1(980,855) 980,852.29 995.24,837.06 995.24,783.24 U1.8 ; JP1.4 1204.2,1140.81 1224.44,1140.81 1227.63,1144 R1.2 1546,1144 1570,1120 IC1.5
  Bottom Layer w10: v1(980,855) 1130,855 1155,880 1155,1091.61 JP1.4
SYNC: R5.1 U1.30 | length 400.6
  Top Layer w10: v1(755,295) R5.1 ; v1(1005,465) 1015.16,475.16 U1.30
  Bottom Layer w10: v1(755,295) 925,465 v1(1005,465)
USB_5V: C12.1 C19.1 C20.2 FB2.1 U2.1 U2.3 U4.9 | length 873.6
  Top Layer w8: U2.1 1657.6,396.03 1662.72,401.15 1724.15,401.15 1728.83,396.46 1728.83,368.45 U2.3
  Top Layer w10: U4.9 1515.01,529.85 1500,514.85 1500,392 C20.2
  Top Layer w18: C12.1@1657.6,311.72 U2.1
  Top Layer w20: C20.2 1534,356 1534,301 FB2.1 1533,140.75 1538.75,135 C19.1 ; C20.2@1536,357 1573,357 1629.48,300.52 1656.48,300.52 C12.1
VBUS: C21.2 C22.2 FB2.2 USB1.1 | length 441.8
  Top Layer w20: USB1.1@1183.31,222.6 1183.31,235.1 1193.31,245.1 1360.1,245.1 1405,290 C21.2 C22.2 1466,356 1466,301 FB2.2
pads on no net: IC1.7 U1.2 U1.3 U1.4 U1.17 U1.18 U1.19 U1.22 U1.24 U1.25 U1.26 U1.27 U1.28 U1.29 U1.31 U1.32 U1.33 U1.34 U1.40 U1.43 U1.47 U2.4 U3.1 U3.6 U4.10 U4.11 U4.14 U4.15 U4.16 USB1.0 UWB1.1 UWB1.9 UWB1.10 UWB1.11 UWB1.14 Y1.2 Y1.4

## Polygon pours and split planes (outlines as drawn)
GND on Bottom Layer "NONET_L02_P-001" (solid, pour order 1): 0,1437.01 143.19,1437.01 143.19,1232.58 143.49,1232.28 654.29,1232.28 654.29,1436.3 655,1437.01 2086.61,1437.01 2086.61,0 0,0
GND on Top Layer "NONET_L02_P-001" (solid, pour order 0): 0,1437.01 143.19,1437.01 143.19,1232.58 143.49,1232.28 654.29,1232.28 654.29,1436.3 655,1437.01 2086.61,1437.01 2086.61,0 0,0

## Keep-outs
Keep-Out Layer:
  the board outline again, w10

## Silkscreen, mask and mechanical layers (free items; w line width, h text height)
Top Overlay:
  text "RST" at 1946,1316 h35
  text "SW++" at 826,1256 h35
  text "SW--" at 1651,1226 h35
  text "SDA" at 1161,1035.12 h35
  text "DIO" at 1861,446 h35
  text "RX_OK" at 596,206.83 h35
  text "TX" at 251,206 h35
  text "RX" at 446,206 h35
Mechanical 1:
  the board outline again, w10

## Text inside footprints (layer, text, board x,y; h text height)
Q2: Mechanical 1 "U1" at 1841.31,1059.17 h35 r180
U4: Mechanical 1 "U1" at 1734.17,768.69 h35 r90